# EAGLE board JFET IV (EAGLE 5.07)
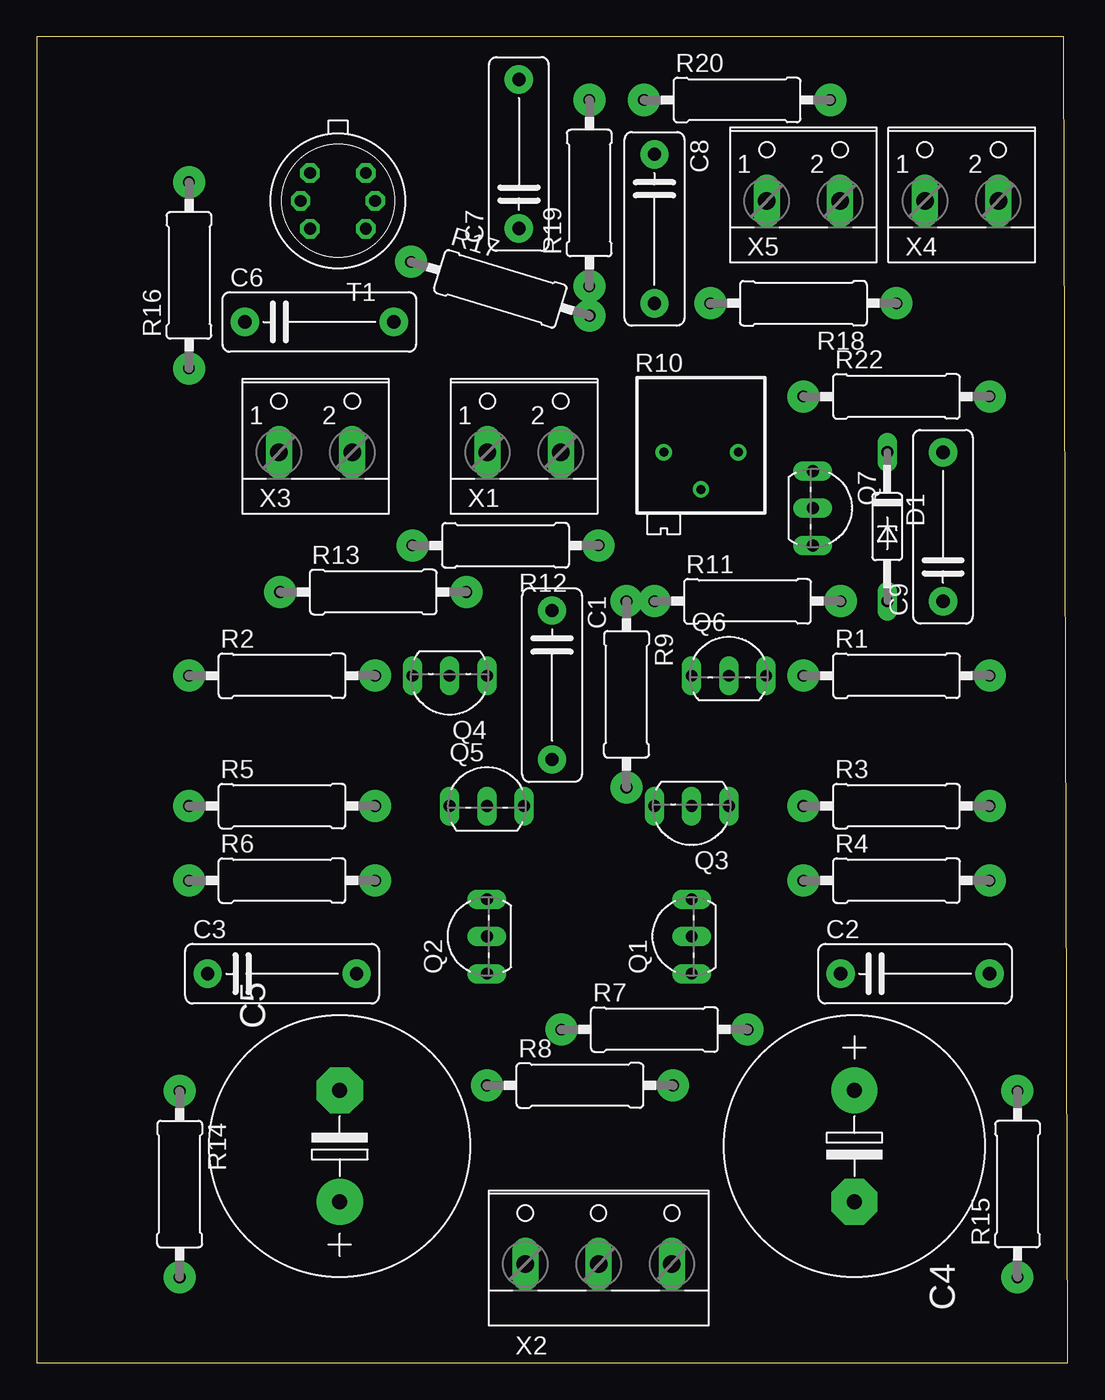
[diagram p0: board, top side]
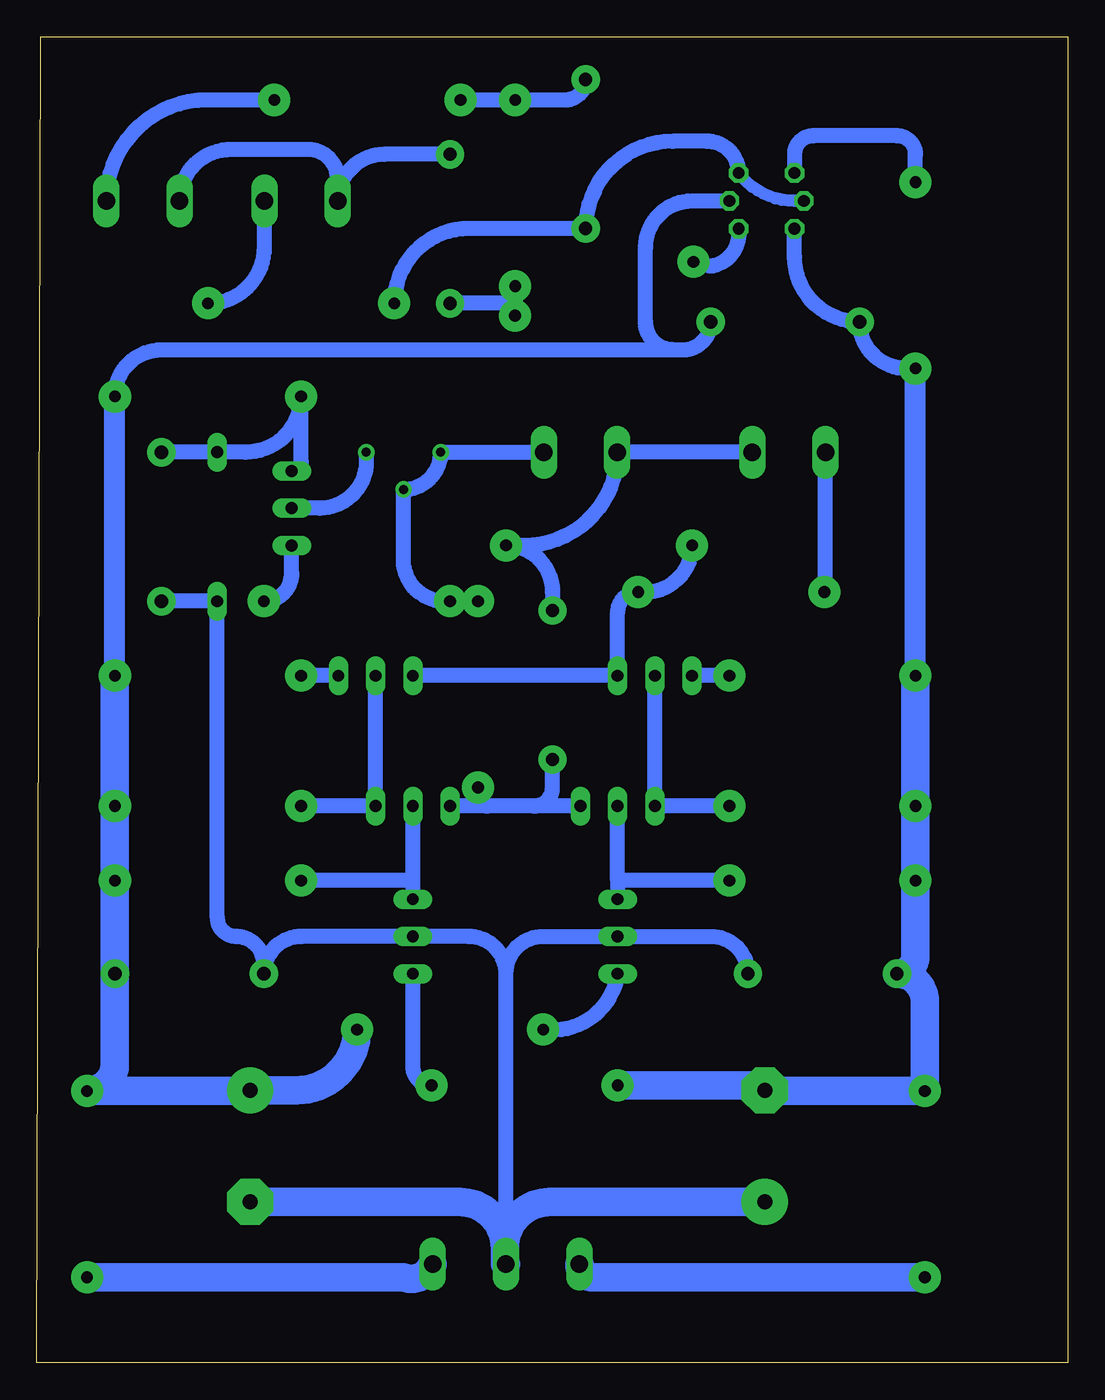
[diagram p1: board, bottom side, seen from below]

Size 70.34 x 90.45 mm. Coordinates in mm from the lower left corner, seen from the top.
Outline: 0,0 70.34,0 70.06,90.45 0,90.45 0,0
Copper layers (1*16): Top 0.035mm / dielectric 1.5mm / Bottom 0.035mm
Design rules "default": minimum track width 10mil, minimum drill 24mil, track to track 8mil, track to pad 8mil, pad to pad 8mil, via to via 8mil, smd to smd 8mil, copper to edge 40mil, drill to drill 8mil, minimum pad ring 10mil, minimum via ring 8mil, stop-mask expansion 4mil, vias tented up to drill 0mil, thermal gap 10mil

## Footprints (pad centres in the part's own frame; a part is rotated, then mirrored left to right if it is on the bottom)
C102-043X133 = drill 0.9 pad 1.93 round: 1 -5.08,0; 2 5.08,0
E7,5-18 = drill 1.016 pad 3.15 round: + -3.81,0 | drill 1.016 pad 3.15 octagon: - 3.81,0
DO35Z10 = drill 0.813 long: A 5.08,0; C -5.08,0
TO92-EBC = drill 0.813 long: B 0,-1.27; C -2.54,-1.27; E 2.54,-1.27
TO92- = drill 0.813 long: 1 2.54,0; 2 0,0; 3 -2.54,0
0309/12 = drill 0.8 pad 2.184 round: 1 -6.35,0; 2 6.35,0
RTRIM3296P = drill 0.61 round: 1 0,-2.54; 2 2.54,0; 3 0,2.54
TO-39 = drill 0.813 octagon: 1 -1.905,-1.905; 2 -2.54,0; 3 -1.905,1.905; 4 1.905,1.905; 5 2.54,0; 6 1.905,-1.905
W237-102 = drill 1.194 long: 1 -2.5,-1.27; 2 2.5,-1.27
W237-103 = drill 1.194 long: 1 -5,-1.29; 2 0,-1.29; 3 5,-1.29

## Placement (x,y rotation side)
C1  1.8nF  [C102-043X133]  35.15,46.23 270 top
C2  1uF  [C102-043X133]  59.92,26.54 0 top
C3  1uF  [C102-043X133]  16.74,26.54 0 top
C4  2200uF  [E7,5-18]  55.78,14.78 270 top
C5  2200uF  [E7,5-18]  20.68,14.78 90 top
C6  .22  [C102-043X133]  19.28,70.99 0 top
C7  10nF  [C102-043X133]  32.89,82.45 90 top
C8  10nF  [C102-043X133]  42.14,77.34 270 top
C9  .22  [C102-043X133]  61.82,57.02 90 top
D1  15V  [DO35Z10]  58.01,57.02 270 top
Q1  BC560C  [TO92-EBC]  43.41,29.08 90 top
Q2  BC550C  [TO92-EBC]  29.44,29.08 90 top
Q3  BC550C  [TO92-EBC]  44.68,36.7 180 top
Q4  BC550C  [TO92-EBC]  28.17,45.59 180 top
Q5  BC560C  [TO92-EBC]  30.71,39.24 0 top
Q6  BC560C  [TO92-EBC]  47.22,48.13 0 top
Q7  J113  [TO92-]  52.93,58.29 270 top
R1  1K  [0309/12]  58.65,46.86 0 top
R2  1K  [0309/12]  16.74,46.86 0 top
R3  1K  [0309/12]  58.65,37.97 0 top
R4  5K  [0309/12]  58.65,32.89 0 top
R5  1K  [0309/12]  16.74,37.97 0 top
R6  5K  [0309/12]  16.74,32.89 0 top
R7  0R  [0309/12]  42.14,22.73 0 top
R8  0R  [0309/12]  37.06,18.92 0 top
R9  0R  [0309/12]  40.23,45.59 270 top
R10  200R  [RTRIM3296P]  45.31,62.1 270 top
R11  1K  [0309/12]  48.49,51.94 0 top
R12  1.5K  [0309/12]  31.98,55.75 180 top
R13  100R  [0309/12]  22.96,52.58 0 top
R14  22R  [0309/12]  9.75,12.19 270 top
R15  22R  [0309/12]  66.9,12.19 90 top
R16  220R  [0309/12]  10.39,74.17 90 top
R17  220R  [0309/12]  31.62,73.25 343.2 top
R18  300R  [0309/12]  52.3,72.26 180 top
R19  620R  [0309/12]  37.69,79.78 90 top
R20  620R  [0309/12]  47.78,86.13 0 top
R22  2.2K  [0309/12]  58.65,65.91 0 top
T1  LSK389  [TO-39]  20.55,79.25 180 top
X1  DACIN  [W237-102]  33.25,63.37 0 top
X2  POWER  [W237-103]  38.33,8.03 0 top
X3  TOVOL  [W237-102]  19.02,63.37 0 top
X4  VOLIN  [W237-102]  63.09,80.52 0 top
X5  OUT  [W237-102]  52.3,80.52 0 top

## Library data of the parts
C1-C9 R1-R20 R22 = resistor
D1 = diode
Q1 Q5 Q6 = transistor-pnp
Q2-Q4 = transistor-npn
Q7 = transistor-fet
T1 = transistor-fet2
X1-X5 = con-wago-500

## Nets
AGND: C1.1 R12.1 X1.1 X3.2
N$1: R9.1 R10.1 R10.2 R11.1 X1.2
N$2: C1.2 Q3.E Q5.E R9.2
N$3: Q4.C Q6.C R12.2 R13.2
N$4: Q2.E Q5.B R6.2
N$5: Q1.E Q3.B R4.1
N$6: Q6.E R1.1
N$7: Q4.E R2.2
N$8: Q3.C Q6.B R3.1
N$9: Q4.B Q5.C R5.2
N$10: C3.1 C5.- C6.1 R2.1 R5.1 R6.1 R8.1 R14.1 R16.1 T1.4
N$11: C2.2 C4.+ C6.2 R1.2 R3.2 R4.2 R7.2 R15.2 R22.2 T1.2
N$12: Q1.C R8.2
N$13: Q2.C R7.1
N$14: Q7.1 R11.2
N$15: Q7.2 R10.3
N$16: R13.1 X3.1
N$17: R15.1 X2.3
N$18: R14.2 X2.1
N$20: C7.1 R18.2 T1.1 T1.5
N$21: R16.2 T1.6
N$22: R18.1 X5.2
N$23: C7.2 R19.2 R20.1
N$24: R17.1 T1.3
N$25: C8.2 R17.2 R19.1
N$26: R20.2 X4.2
N$27: C8.1 X4.1 X5.1
N$28: C9.2 D1.C Q7.3 R22.1
PE: C2.1 C3.2 C4.- C5.+ C9.1 D1.A Q1.B Q2.B X2.2

## Tracks (layer width: path | path; a pad name or v marks a point on that pad's centre or on a via)
AGND
  Bottom 1.016: C1.1 35.15,52.58 arc-90 R12.1 37.06,55.75 arc-90 30.75,62.06 X1.1 X3.2
N$1
  Bottom 1.016: R9.1 R11.1 arc90 45.31,54.48 R10.2 arc-90 R10.1 X1.2
N$2
  Bottom 1.016: Q5.E 36.42,37.97 | 36.42,37.97 39.6,37.97 | 39.6,37.97 Q3.E | C1.2 35.15,39.24 arc90 36.42,37.97 | R9.2 40.23,38.61 arc-90 39.6,37.97
N$3
  Bottom 1.016: Q6.C Q4.C 30.71,51.18 arc90 R13.2 28.8,52.58 arc-90 R12.2
N$4
  Bottom 1.016: 30.71,32.89 Q2.E | 30.71,32.89 Q5.B | R6.2 30.71,32.89
N$5
  Bottom 1.016: Q1.E 44.68,32.89 | 44.68,32.89 Q3.B | 44.68,32.89 R4.1
N$6
  Bottom 1.016: Q6.E R1.1
N$7
  Bottom 1.016: R2.2 Q4.E
N$8
  Bottom 1.016: Q6.B Q3.C R3.1
N$9
  Bottom 1.016: Q4.B Q5.C R5.2
N$10
  Bottom 1.016: R16.1 11.02,67.82 arc90 C6.1 arc90 18.64,75.44 T1.4
  Bottom 1.422: R2.1 R16.1
  Bottom 1.93: R2.1 R5.1 R6.1 | R6.1 10.39,31.62 | R6.1 10.39,27.81 arc90 C3.1 arc90 9.75,24.64 R14.1 20.68,18.54 C5.- 20.68,18.92 R8.1
N$11
  Bottom 1.016: C6.2 arc90 26.26,69.09 26.9,69.09 | 26.9,69.09 61.82,69.09 arc-90 R22.2 | T1.2 25.63,79.25 arc-90 28.8,76.07 28.8,70.99 arc-90 26.9,69.09
  Bottom 1.422: R1.2 R22.2
  Bottom 1.93: R1.2 R3.2 R4.2 C2.2 65,20.45 arc90 R15.2 55.83,18.54 arc-90 C4.+ 52.63,18.59 arc-90 R7.2
N$12
  Bottom 1.016: R8.2 arc90 44.68,20.19 Q1.C
N$13
  Bottom 1.016: Q2.C arc90 R7.1
N$14
  Bottom 1.016: Q7.1 52.93,53.85 arc90 R11.2
N$15
  Bottom 1.016: Q7.2 51.03,58.29 arc-90 47.85,61.47 R10.3
N$16
  Bottom 1.016: X3.1 16.52,52.66 arc90 R13.1
N$17
  Bottom 1.93: R15.1 45.34,5.84 arc-90 X2.3
N$18
  Bottom 1.93: R14.2 32.43,5.84 arc90 X2.1
N$20
  Bottom 0.813: T1.5 18.64,79.25 arc53 T1.1
  Bottom 1.016: T1.1 arc-90 24.61,83.31 26.95,83.31 arc-90 C7.1 40.84,77.37 arc-90 R18.2
N$21
  Bottom 1.016: T1.6 18.64,82.42 arc90 17.37,83.69 11.66,83.69 arc90 10.39,82.42 R16.2
N$22
  Bottom 1.016: X5.2 54.8,76.11 arc90 R18.1
N$23
  Bottom 1.016: C7.2 arc90 34.29,86.13 R19.2 R20.1
N$24
  Bottom 1.016: R17.1 24.36,74.8 arc-90 T1.3
N$25
  Bottom 1.016: R19.1 arc-90 37.7,73.42 R17.2 arc-90 38.55,72.26 C8.2
N$26
  Bottom 1.016: R20.2 58.71,86.13 arc-90 X4.2
N$27
  Bottom 1.016: X4.1 arc90 57.09,82.75 51.82,82.75 arc90 49.8,80.74 X5.1 arc90 46.62,82.42 C8.1
N$28
  Bottom 1.016: Q7.3 arc-90 52.3,61.47 R22.1 arc90 56.11,62.1 D1.C C9.2
PE
  Bottom 1.016: 24.36,29.08 arc90 C3.2 arc-90 24.36,29.08 | 24.36,29.08 Q2.B 35.79,29.08 arc-90 38.33,26.54 | 38.33,26.54 arc-90 40.87,29.08 Q1.B 52.3,29.08 arc-90 C2.1 54.84,27.18 arc-90 56.74,29.08 arc90 58.01,30.35 D1.A C9.1 | X2.2 38.33,26.54
  Bottom 1.93: C5.+ 35.31,10.97 arc-90 38.4,7.87 | 38.4,7.87 38.4,6.81 arc-90 X2.2 | C4.- 41.5,10.97 arc90 38.4,7.87